# Altium PCB Inverter - Copy (2).PcbDoc (part 2 of 2)
Units mm, origin at the board's own origin, x right, y up, seen from the top; angles counter-clockwise.
Board outline 150 x 100 mm, 2 copper layers (Top Layer, Bottom Layer), stack 1.74 mm thick; 290 components, 203 nets, 1847 pads, 721 vias.
Unrouted connection lines stored in the file: 462.
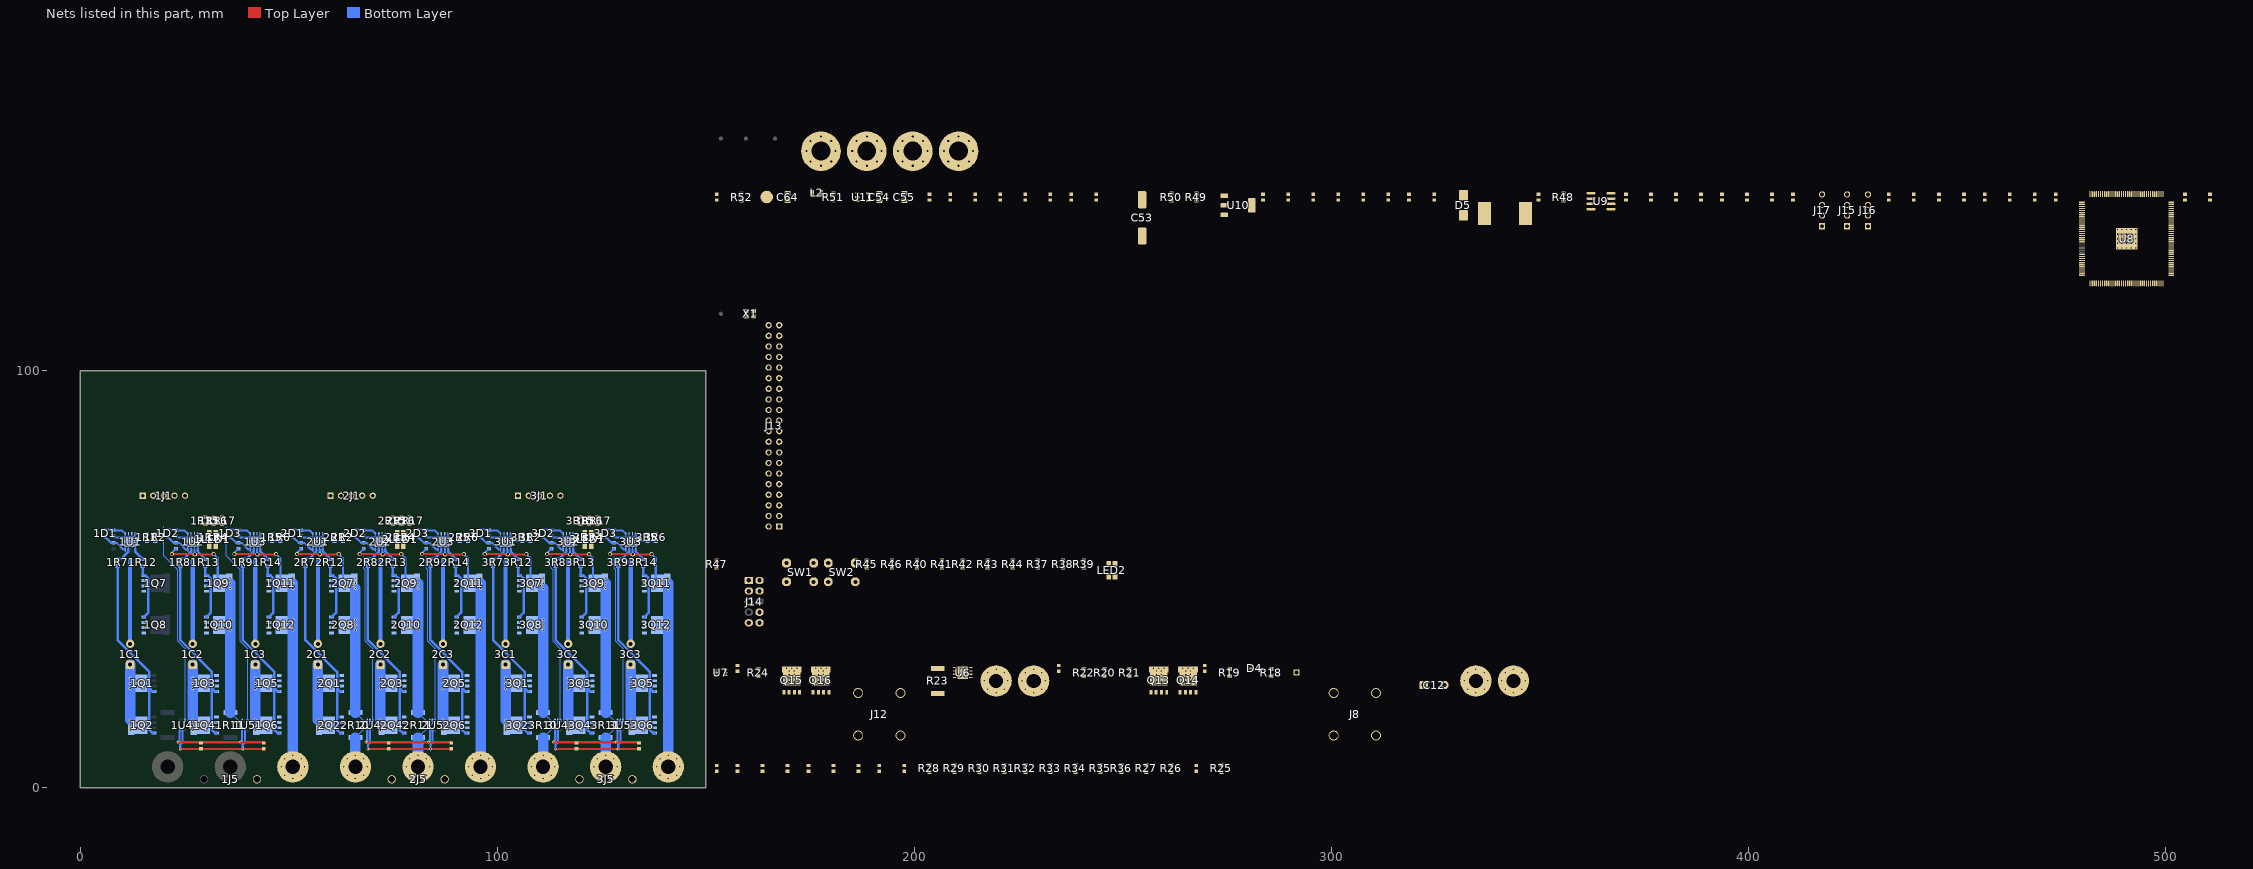
[diagram p2: the nets of this part, all layers, seen from the top]

## Via types
v1: diameter 0.7, hole 0.3, Top Layer to Bottom Layer, 525 vias
v2: diameter 0.7, hole 0.35, Top Layer to Bottom Layer, 128 vias
v3: diameter 1, hole 0.6, Top Layer to Bottom Layer, 36 vias
v4: diameter 1.27, hole 0.5, Top Layer to Bottom Layer, 32 vias

## Nets (pads, with @x,y where several pads share a name; then routed paths per layer and width w, separated by ;. In a path a pad name is that pad's centre, name@x,y a point inside that pad or via, vN(x,y) a via of type N, cw(c..) or ccw(c..) an arc to the next point about the centre after c; other vN are vias at no path point) (continued)
1PH_B_Q: 1C5.1 1Q3.S 1Q4.S 1Q9.D 1Q10.D 1R11.2 1U2.6 1U5.4 | length 54.4
  Top Layer w0.5: v3(22,56) v3@27.4,56 ; v3(27.5,55.9) v3@31.9,55.9
  Bottom Layer w0.254: 1R11.2@36,18 37.875,16.125 1U5.4@38.85,16.125
  Bottom Layer w0.5: v3@22,56.3 1C5.1@23,57.3 ; v3@27.45,55.95 1U2.6@27.45,57.055 ; v3(32,56) 33,55 1Q9.D@33,49
  Bottom Layer w2.54: 1R11.2@36,18 v1(36,39) v1(36,40.25) v1(36,47.75) v1(36,49)
  other v1: 36,37.75 32.875,38.425 33.7,38.425 34.55,38.425 35.375,38.425 32.9,39.575 33.725,39.575 34.575,39.575 35.4,39.575 32.875,48.425 33.7,48.425 34.55,48.425 35.375,48.425 32.9,49.575 33.725,49.575 34.575,49.575 35.4,49.575 36,50.25
1PH_C: 1C6.1 1J4.1 1J5.3 1Q5.S 1Q6.S 1Q11.D 1Q12.D 1U3.6 | length 63.7
  Top Layer w0.5: v3(37,56) v3@42.4,56 ; v3(42.5,55.9) v3@46.9,55.9
  Bottom Layer w0.5: v3@37,56.3 1C6.1@38,57.3 ; v3@42.45,55.95 1U3.6@42.45,57.055 ; v3(47,56) 48,55 1Q11.D@48,49
  Bottom Layer w2.54: 1J4.1@51,5 v1(51,37.75) v1(51,39) v1(51,40.25) v1(51,47.75) v1(51,49)
  other v1: 47.875,38.425 48.7,38.425 49.55,38.425 50.375,38.425 47.9,39.575 48.725,39.575 49.575,39.575 50.4,39.575 47.875,48.425 48.7,48.425 49.55,48.425 50.375,48.425 47.9,49.575 48.725,49.575 49.575,49.575 50.4,49.575 51,50.25
  other v2: 51,2.2 49.02,3.02 52.98,3.02 48.2,5 53.8,5 49.02,6.98 52.98,6.98 51,7.8
2PH_A: 2J2.1 2J5.1 2R10.1 2U4.5 | length 12.6
  Bottom Layer w0.254: 2R10.1@66,12 69.5,15.5 2U4.5@69.5,16.125
  Bottom Layer w2.54: 2J2.1@66,5 v2(66,7.8) 2R10.1@66,12
  other v2: 66,2.2 64.02,3.02 67.98,3.02 63.2,5 68.8,5 64.02,6.98 67.98,6.98
2PH_A_Q: 2C4.1 2Q1.S 2Q2.S 2Q7.D 2Q8.D 2R10.2 2U1.6 2U4.4 | length 53.7
  Top Layer w0.5: v3(52,56) v3@57.4,56 ; v3(57.5,55.9) 61.9,55.9 v3(62,56)
  Bottom Layer w0.254: 2R10.2@66,18 67.875,16.125 2U4.4@68.85,16.125
  Bottom Layer w0.5: v3(52,56) 52,56.3 2C4.1@53,57.3 ; 2U1.6@57.4,57.105 57.45,57.055 57.45,55.95 v3(57.5,55.9) ; v3(62,56) 63,55 2Q7.D@63,49
  Bottom Layer w2.54: 2R10.2@66,18 v1(66,37.75) v1(66,39) v1(66,40.25) v1(66,47.75)
  other v1: 62.875,38.425 63.7,38.425 64.55,38.425 65.375,38.425 62.9,39.575 63.725,39.575 64.575,39.575 65.4,39.575 62.875,48.425 63.7,48.425 64.55,48.425 65.375,48.425 66,49 62.9,49.575 63.725,49.575 64.575,49.575 65.4,49.575 66,50.25
2PH_B: 2J3.1 2J5.2 2R11.1 2U5.5 | length 12.6
  Bottom Layer w0.254: 2R11.1@81,12 84.5,15.5 2U5.5@84.5,16.125
  Bottom Layer w2.54: 2J3.1@81,5 v2(81,7.8) 2R11.1@81,12
  other v2: 81,2.2 79.02,3.02 82.98,3.02 78.2,5 83.8,5 79.02,6.98 82.98,6.98
2PH_B_Q: 2C5.1 2Q3.S 2Q4.S 2Q9.D 2Q10.D 2R11.2 2U2.6 2U5.4 | length 54.4
  Top Layer w0.5: v3(67,56) v3@72.4,56 ; v3(72.5,55.9) v3@76.9,55.9
  Bottom Layer w0.254: 2R11.2@81,18 82.875,16.125 2U5.4@83.85,16.125
  Bottom Layer w0.5: v3@67,56.3 2C5.1@68,57.3 ; v3@72.45,55.95 2U2.6@72.45,57.055 ; v3(77,56) 78,55 2Q9.D@78,49
  Bottom Layer w2.54: 2R11.2@81,18 v1(81,39) v1(81,40.25) v1(81,47.75) v1(81,49)
  other v1: 81,37.75 77.875,38.425 78.7,38.425 79.55,38.425 80.375,38.425 77.9,39.575 78.725,39.575 79.575,39.575 80.4,39.575 77.875,48.425 78.7,48.425 79.55,48.425 80.375,48.425 77.9,49.575 78.725,49.575 79.575,49.575 80.4,49.575 81,50.25
2PH_C: 2C6.1 2J4.1 2J5.3 2Q5.S 2Q6.S 2Q11.D 2Q12.D 2U3.6 | length 63.7
  Top Layer w0.5: v3(82,56) v3@87.4,56 ; v3(87.5,55.9) v3@91.9,55.9
  Bottom Layer w0.5: v3@82,56.3 2C6.1@83,57.3 ; v3@87.45,55.95 2U3.6@87.45,57.055 ; v3(92,56) 93,55 2Q11.D@93,49
  Bottom Layer w2.54: 2J4.1@96,5 v1(96,37.75) v1(96,39) v1(96,40.25) v1(96,47.75) v1(96,49)
  other v1: 92.875,38.425 93.7,38.425 94.55,38.425 95.375,38.425 92.9,39.575 93.725,39.575 94.575,39.575 95.4,39.575 92.875,48.425 93.7,48.425 94.55,48.425 95.375,48.425 92.9,49.575 93.725,49.575 94.575,49.575 95.4,49.575 96,50.25
  other v2: 96,2.2 94.02,3.02 97.98,3.02 93.2,5 98.8,5 94.02,6.98 97.98,6.98 96,7.8
3PH_A: 3J2.1 3J5.1 3R10.1 3U4.5 | length 12.6
  Bottom Layer w0.254: 3R10.1@111,12 114.5,15.5 3U4.5@114.5,16.125
  Bottom Layer w2.54: 3J2.1@111,5 v2(111,7.8) 3R10.1@111,12
  other v2: 111,2.2 109.02,3.02 112.98,3.02 108.2,5 113.8,5 109.02,6.98 112.98,6.98
3PH_A_Q: 3C4.1 3Q1.S 3Q2.S 3Q7.D 3Q8.D 3R10.2 3U1.6 3U4.4 | length 53.7
  Top Layer w0.5: v3(97,56) v3@102.4,56 ; v3(102.5,55.9) 106.9,55.9 v3(107,56)
  Bottom Layer w0.254: 3R10.2@111,18 112.875,16.125 3U4.4@113.85,16.125
  Bottom Layer w0.5: v3(97,56) 97,56.3 3C4.1@98,57.3 ; 3U1.6@102.4,57.105 102.45,57.055 102.45,55.95 v3(102.5,55.9) ; v3(107,56) 108,55 3Q7.D@108,49
  Bottom Layer w2.54: 3R10.2@111,18 v1(111,37.75) v1(111,39) v1(111,40.25) v1(111,47.75)
  other v1: 107.875,38.425 108.7,38.425 109.55,38.425 110.375,38.425 107.9,39.575 108.725,39.575 109.575,39.575 110.4,39.575 107.875,48.425 108.7,48.425 109.55,48.425 110.375,48.425 111,49 107.9,49.575 108.725,49.575 109.575,49.575 110.4,49.575 111,50.25
3PH_B: 3J3.1 3J5.2 3R11.1 3U5.5 | length 12.6
  Bottom Layer w0.254: 3R11.1@126,12 129.5,15.5 3U5.5@129.5,16.125
  Bottom Layer w2.54: 3J3.1@126,5 v2(126,7.8) 3R11.1@126,12
  other v2: 126,2.2 124.02,3.02 127.98,3.02 123.2,5 128.8,5 124.02,6.98 127.98,6.98
3PH_B_Q: 3C5.1 3Q3.S 3Q4.S 3Q9.D 3Q10.D 3R11.2 3U2.6 3U5.4 | length 54.4
  Top Layer w0.5: v3(112,56) v3@117.4,56 ; v3(117.5,55.9) v3@121.9,55.9
  Bottom Layer w0.254: 3R11.2@126,18 127.875,16.125 3U5.4@128.85,16.125
  Bottom Layer w0.5: v3@112,56.3 3C5.1@113,57.3 ; v3@117.45,55.95 3U2.6@117.45,57.055 ; v3(122,56) 123,55 3Q9.D@123,49
  Bottom Layer w2.54: 3R11.2@126,18 v1(126,39) v1(126,40.25) v1(126,47.75) v1(126,49)
  other v1: 126,37.75 122.875,38.425 123.7,38.425 124.55,38.425 125.375,38.425 122.9,39.575 123.725,39.575 124.575,39.575 125.4,39.575 122.875,48.425 123.7,48.425 124.55,48.425 125.375,48.425 122.9,49.575 123.725,49.575 124.575,49.575 125.4,49.575 126,50.25
3PH_C: 3C6.1 3J4.1 3J5.3 3Q5.S 3Q6.S 3Q11.D 3Q12.D 3U3.6 | length 63.7
  Top Layer w0.5: v3(127,56) v3@132.4,56 ; v3(132.5,55.9) v3@136.9,55.9
  Bottom Layer w0.5: v3@127,56.3 3C6.1@128,57.3 ; v3@132.45,55.95 3U3.6@132.45,57.055 ; v3(137,56) 138,55 3Q11.D@138,49
  Bottom Layer w2.54: 3J4.1@141,5 v1(141,37.75) v1(141,39) v1(141,40.25) v1(141,47.75) v1(141,49)
  other v1: 137.875,38.425 138.7,38.425 139.55,38.425 140.375,38.425 137.9,39.575 138.725,39.575 139.575,39.575 140.4,39.575 137.875,48.425 138.7,48.425 139.55,48.425 140.375,48.425 137.9,49.575 138.725,49.575 139.575,49.575 140.4,49.575 141,50.25
  other v2: 141,2.2 139.02,3.02 142.98,3.02 138.2,5 143.8,5 139.02,6.98 142.98,6.98 141,7.8
5V: 1J1.1 2J1.1 3J1.1 C53.1 J15.1 J15.2 J15.3 J15.4 L1.1 R49.1 U10.3
12V: 1C7.2 1C8.2 1C9.2 1D1.A 1D2.A 1D3.A 1U1.1 1U2.1 1U3.1 2C7.2 2C8.2 2C9.2 2D1.A 2D2.A 2D3.A 2U1.1 2U2.1 2U3.1 3C7.2 3C8.2 3C9.2 3D1.A 3D2.A 3D3.A 3U1.1 3U2.1 3U3.1 C14.2 C65.2 D4.A U6.1 U11.5 | length 46.9
  Bottom Layer w0.5: 1D1.A@6,61.9 7.8,61.9 1C7.2@8,61.7 9.995,61.7 1U1.1@10.8,60.895 ; 1D2.A@21,61.9 22.8,61.9 1C8.2@23,61.7 24.995,61.7 1U2.1@25.8,60.895 ; 1D3.A@36,61.9 37.8,61.9 1C9.2@38,61.7 39.995,61.7 1U3.1@40.8,60.895 ; 2D1.A@51,61.9 52.8,61.9 2C7.2@53,61.7 54.995,61.7 2U1.1@55.8,60.895 ; 2D2.A@66,61.9 67.8,61.9 2C8.2@68,61.7 69.995,61.7 2U2.1@70.8,60.895 ; 2D3.A@81,61.9 82.8,61.9 2C9.2@83,61.7 84.995,61.7 2U3.1@85.8,60.895 ; 3D1.A@96,61.9 97.8,61.9 3C7.2@98,61.7 99.995,61.7 3U1.1@100.8,60.895 ; 3D2.A@111,61.9 112.8,61.9 3C8.2@113,61.7 114.995,61.7 3U2.1@115.8,60.895 ; 3D3.A@126,61.9 127.8,61.9 3C9.2@128,61.7 129.995,61.7 3U3.1@130.8,60.895
AGND: 1C10.1 1C11.1 1U4.2 1U5.2 2C10.1 2C11.1 2U4.2 2U5.2 3C10.1 3C11.1 3U4.2 3U5.2 C15.1 C16.1 C17.1 C18.1 C19.1 C20.1 C21.1 C22.1 C23.1 C24.1 C25.1 C26.1 C27.1 C45.1 C46.1 C47.1 C48.1 C49.1 C50.1 C51.1 C52.1 C64.1 R19.1 R27.1 R52.1 SP1.2 U7.2 U8.4 | length 88.7
  Top Layer w0.5: v2@24,9.248 29,9.248 1C11.1@44,9.248 ; v2@69,9.248 74,9.248 2C11.1@89,9.248 ; v2@114,9.248 119,9.248 3C11.1@134,9.248
  Bottom Layer w0.5: v2(24,9.3) 24,10.336 24.5,10.836 1U4.2@24.5,13.875 ; v2(39,9.3) 39,10.336 39.5,10.836 1U5.2@39.5,13.875 ; v2(69,9.3) 69,10.336 69.5,10.836 2U4.2@69.5,13.875 ; v2(84,9.3) 84,10.336 84.5,10.836 2U5.2@84.5,13.875 ; v2(114,9.3) 114,10.336 114.5,10.836 3U4.2@114.5,13.875 ; v2(129,9.3) 129,10.336 129.5,10.836 3U5.2@129.5,13.875
AUX_+: J10.1 J12.1 R23.1 U7.5
  other v2: 219.6,22.8 217.62,23.62 221.58,23.62 216.8,25.6 222.4,25.6 217.62,27.58 221.58,27.58 219.6,28.4
AVCC: 1C10.2 1C11.2 1U4.3 1U5.3 2C10.2 2C11.2 2U4.3 2U5.3 3C10.2 3C11.2 3U4.3 3U5.3 C15.2 C26.2 C27.2 C45.2 C46.2 C47.2 C48.2 C49.2 C50.2 C51.2 C52.2 C64.2 L2.1 R25.2 U7.3 U8.2 U8.9 U8.34 U8.35 U8.71 U8.107 U8.143 | length 80.2
  Top Layer w0.5: v2(23.5,10.9) 1C11.2@44,10.9 ; v2(68.5,10.9) 2C11.2@89,10.9 ; v2(113.5,10.9) 3C11.2@134,10.9
  Bottom Layer w0.5: v2(23.5,10.9) 23.848,11.248 1U4.3@23.848,13.875 ; v2(38.5,10.9) 38.848,11.248 1U5.3@38.848,13.873 ; v2(68.5,10.9) 68.848,11.248 2U4.3@68.848,13.875 ; v2(83.5,10.9) 83.848,11.248 2U5.3@83.848,13.873 ; v2(113.5,10.9) 113.848,11.248 3U4.3@113.848,13.875 ; v2(128.5,10.9) 128.848,11.248 3U5.3@128.848,13.873
CLK_50: U8.27 X1.3
CONF_DONE: R45.1 U8.138
CRC_ERROR: R38.2 U8.134
DCBUS: 1C1.1 1C2.1 1C3.1 1Q1.D 1Q2.D 1Q3.D 1Q4.D 1Q5.D 1Q6.D 2C1.1 2C2.1 2C3.1 2Q1.D 2Q2.D 2Q3.D 2Q4.D 2Q5.D 2Q6.D 3C1.1 3C2.1 3C3.1 3Q1.D 3Q2.D 3Q3.D 3Q4.D 3Q5.D 3Q6.D C12.1 J6.1 J8.2 Q13.D Q14.D R26.2 R48.2 U9.6 U11.4 | length 119.2
  Bottom Layer w2.54: v1(12,16.25) v1(12,23.75) v1(12,25) v1(12,26.25) 1C1.1@12,29.5 ; v1(27,16.25) v1(27,23.75) v1(27,25) v1(27,26.25) 1C2.1@27,29.5 ; v1(42,16.25) v1(42,23.75) v1(42,25) v1(42,26.25) 1C3.1@42,29.5 ; v1(57,16.25) v1(57,23.75) v1(57,25) v1(57,26.25) 2C1.1@57,29.5 ; v1(72,16.25) v1(72,23.75) v1(72,25) v1(72,26.25) 2C2.1@72,29.5 ; v1(87,16.25) v1(87,23.75) v1(87,25) v1(87,26.25) 2C3.1@87,29.5 ; v1(102,16.25) v1(102,23.75) v1(102,25) v1(102,26.25) 3C1.1@102,29.5 ; v1(117,16.25) v1(117,23.75) v1(117,25) v1(117,26.25) 3C2.1@117,29.5 ; v1(132,16.25) v1(132,23.75) v1(132,25) v1(132,26.25) 3C3.1@132,29.5
  other v1: 12,13.75 27,13.75 42,13.75 57,13.75 72,13.75 87,13.75 102,13.75 117,13.75 132,13.75 12.6,14.425 13.425,14.425 14.275,14.425 15.1,14.425 27.6,14.425 28.425,14.425 29.275,14.425 30.1,14.425 42.6,14.425 43.425,14.425 44.275,14.425 45.1,14.425 57.6,14.425 58.425,14.425 59.275,14.425 60.1,14.425 72.6,14.425 73.425,14.425 74.275,14.425 75.1,14.425 87.6,14.425 88.425,14.425 89.275,14.425 90.1,14.425 102.6,14.425 103.425,14.425 104.275,14.425 105.1,14.425 117.6,14.425 118.425,14.425 119.275,14.425 120.1,14.425 132.6,14.425 133.425,14.425 134.275,14.425 135.1,14.425 12,15 27,15 42,15 57,15 72,15 87,15 102,15 117,15 132,15 12.625,15.575 13.45,15.575 14.3,15.575 15.125,15.575 27.625,15.575 28.45,15.575 29.3,15.575 30.125,15.575 42.625,15.575 43.45,15.575 44.3,15.575 45.125,15.575 57.625,15.575 58.45,15.575 59.3,15.575 60.125,15.575 72.625,15.575 73.45,15.575 74.3,15.575 75.125,15.575 87.625,15.575 88.45,15.575 89.3,15.575 90.125,15.575 102.625,15.575 103.45,15.575 104.3,15.575 105.125,15.575 117.625,15.575 118.45,15.575 119.3,15.575 120.125,15.575 132.625,15.575 133.45,15.575 134.3,15.575 135.125,15.575 12.6,24.425 13.425,24.425 14.275,24.425 15.1,24.425 27.6,24.425 28.425,24.425 29.275,24.425 30.1,24.425 42.6,24.425 43.425,24.425 44.275,24.425 45.1,24.425 57.6,24.425 58.425,24.425 59.275,24.425 60.1,24.425 72.6,24.425 73.425,24.425 74.275,24.425 75.1,24.425 87.6,24.425 88.425,24.425 89.275,24.425 90.1,24.425 102.6,24.425 103.425,24.425 104.275,24.425 105.1,24.425 117.6,24.425 118.425,24.425 119.275,24.425 120.1,24.425 132.6,24.425 133.425,24.425 134.275,24.425 135.1,24.425 258.025,25.475 265.025,25.475 259.175,25.5 266.175,25.5 12.625,25.575 13.45,25.575 14.3,25.575 15.125,25.575 27.625,25.575 28.45,25.575 29.3,25.575 30.125,25.575 42.625,25.575 43.45,25.575 44.3,25.575 45.125,25.575 57.625,25.575 58.45,25.575 59.3,25.575 60.125,25.575 72.625,25.575 73.45,25.575 74.3,25.575 75.125,25.575 87.625,25.575 88.45,25.575 89.3,25.575 90.125,25.575 102.625,25.575 103.45,25.575 104.3,25.575 105.125,25.575 117.625,25.575 118.45,25.575 119.3,25.575 120.125,25.575 132.625,25.575 133.45,25.575 134.3,25.575 135.125,25.575 258.025,26.3 265.025,26.3 259.175,26.325 266.175,26.325 258.025,27.15 265.025,27.15 259.175,27.175 266.175,27.175 258.025,27.975 265.025,27.975 259.175,28 266.175,28 257.35,28.6 258.6,28.6 259.85,28.6 264.35,28.6 265.6,28.6 266.85,28.6
  other v2: 334.6,22.8 332.62,23.62 336.58,23.62 331.8,25.6 337.4,25.6 332.62,27.58 336.58,27.58 334.6,28.4
ENC_A1: 1J1.2 U8.124
ENC_A2: 2J1.2 U8.131
ENC_A3: 3J1.2 U8.140
ENC_B1: 1J1.3 U8.127
ENC_B2: 2J1.3 U8.132
ENC_B3: 3J1.3 U8.141
ENC_Z1: 1J1.4 U8.130
ENC_Z2: 2J1.4 U8.135
ENC_Z3: 3J1.4 U8.120
GND: 1C1.2 1C2.2 1C3.2 1C7.1 1C8.1 1C9.1 1J1.5 1Q7.S 1Q8.S 1Q9.S 1Q10.S 1Q11.S 1Q12.S 1R1.1 1R2.1 1R3.1 1R4.1 1R5.1 1R6.1 1U1.4 1U1.9 1U2.4 1U2.9 1U3.4 1U3.9 2C1.2 2C2.2 2C3.2 2C7.1 2C8.1 2C9.1 2J1.5 2Q7.S 2Q8.S 2Q9.S 2Q10.S 2Q11.S 2Q12.S 2R1.1 2R2.1 2R3.1 2R4.1 2R5.1 2R6.1 2U1.4 2U1.9 2U2.4 2U2.9 2U3.4 2U3.9 3C1.2 3C2.2 3C3.2 3C7.1 3C8.1 3C9.1 3J1.5 3Q7.S 3Q8.S 3Q9.S 3Q10.S 3Q11.S 3Q12.S 3R1.1 3R2.1 3R3.1 3R4.1 3R5.1 3R6.1 3U1.4 3U1.9 3U2.4 3U2.9 3U3.4 3U3.9 C12.2 C14.1 C28.1 C29.1 C30.1 C31.1 C32.1 C33.1 C34.1 C35.1 C36.1 C37.1 C38.1 C39.1 C40.1 C41.1 C42.1 C43.1 C44.1 C53.2 C54.1 C55.1 C56.1 C57.1 C58.1 C59.1 C60.1 C61.1 C62.1 C63.1 C65.1 D5.A J7.1 J8.1 J11.1 J12.2 J14.2 J14.10 J17.1 J17.2 J17.3 J17.4 MH1.1 MH2.1 MH3.1 MH4.1 Q15.S Q16.S R20.1 R21.1 R47.1 R50.1 SP1.1 SW1.1 SW2.1 U6.4 U6.9 U8.42 U8.53 U8.63 U8.68 U8.83 U8.95 U8.104 U8.116 U8.125 U8.133 U8.137 U8.142 U8.145 U9.4 U10.1 U11.2 X1.2 | length 274.9
  Bottom Layer w0.5: 1C7.1@8,60.3 8.3,60 10.5,60 v1(11,59.5) ; 1U1.9@12,59 12.15,59.15 1R1.1@16,59.15 1R2.1@18,59.15 ; v1(13,59.5) 13.2,59.7 1U1.4@13.2,60.895 ; 1C8.1@23,60.3 23.3,60 25.5,60 v1(26,59.5) ; 1U2.9@27.15,59.15 1R3.1@31,59.15 1R4.1@33,59.15 ; 1U2.9@28.2,59.7 1U2.4@28.2,60.895 ; 1C9.1@38,60.3 38.3,60 40.5,60 v1(41,59.5) ; 1U3.9@42.15,59.15 1R5.1@46,59.15 1R6.1@48,59.15 ; 1U3.9@43.2,59.7 1U3.4@43.2,60.895 ; 2C7.1@53,60.3 53.3,60 55.5,60 v1(56,59.5) ; 2U1.9@57,59 57.15,59.15 2R1.1@61,59.15 2R2.1@63,59.15 ; v1(58,59.5) 58.2,59.7 2U1.4@58.2,60.895 ; 2C8.1@68,60.3 68.3,60 70.5,60 v1(71,59.5) ; 2U2.9@72.15,59.15 2R3.1@76,59.15 2R4.1@78,59.15 ; 2U2.9@73.2,59.7 2U2.4@73.2,60.895 ; 2C9.1@83,60.3 83.3,60 85.5,60 v1(86,59.5) ; 2U3.9@87.15,59.15 2R5.1@91,59.15 2R6.1@93,59.15 ; 2U3.9@88.2,59.7 2U3.4@88.2,60.895 ; 3C7.1@98,60.3 98.3,60 100.5,60 v1(101,59.5) ; 3U1.9@102,59 102.15,59.15 3R1.1@106,59.15 3R2.1@108,59.15 ; v1(103,59.5) 103.2,59.7 3U1.4@103.2,60.895 ; 3C8.1@113,60.3 113.3,60 115.5,60 v1(116,59.5) ; 3U2.9@117.15,59.15 3R3.1@121,59.15 3R4.1@123,59.15 ; 3U2.9@118.2,59.7 3U2.4@118.2,60.895 ; 3C9.1@128,60.3 128.3,60 130.5,60 v1(131,59.5) ; 3U3.9@132.15,59.15 3R5.1@136,59.15 3R6.1@138,59.15 ; 3U3.9@133.2,59.7 3U3.4@133.2,60.895
  Bottom Layer w1: 1C1.2@12,34.5 12,54.5 ; 1C2.2@27,34.5 27,54.5 ; 1C3.2@42,34.5 42,54.5 ; 2C1.2@57,34.5 57,54.5 ; 2C2.2@72,34.5 72,54.5 ; 2C3.2@87,34.5 87,54.5 ; 3C1.2@102,34.5 102,54.5 ; 3C2.2@117,34.5 117,54.5 ; 3C3.2@132,34.5 132,54.5
  other v1: 211.1,26.6 212.1,26.6 211.1,27.6 212.1,27.6 211.1,28.6 212.1,28.6 11,58.5 12,58.5 13,58.5 26,58.5 27,58.5 28,58.5 41,58.5 42,58.5 43,58.5 56,58.5 57,58.5 58,58.5 71,58.5 72,58.5 73,58.5 86,58.5 87,58.5 88,58.5 101,58.5 102,58.5 103,58.5 116,58.5 117,58.5 118,58.5 131,58.5 132,58.5 133,58.5 12,59.5 27,59.5 28,59.5 42,59.5 43,59.5 57,59.5 72,59.5 73,59.5 87,59.5 88,59.5 102,59.5 117,59.5 118,59.5 132,59.5 133,59.5 488.4,129.4 489.5,129.4 490.6,129.4 491.7,129.4 492.8,129.4 488.4,130.5 489.5,130.5 490.6,130.5 491.7,130.5 492.8,130.5 488.4,131.6 489.5,131.6 490.6,131.6 491.7,131.6 492.8,131.6 488.4,132.7 489.5,132.7 490.6,132.7 491.7,132.7 492.8,132.7 488.4,133.8 489.5,133.8 490.6,133.8 491.7,133.8 492.8,133.8
  other v2: 228.6,22.8 343.6,22.8 226.62,23.62 230.58,23.62 341.62,23.62 345.58,23.62 225.8,25.6 231.4,25.6 340.8,25.6 346.4,25.6 226.62,27.58 230.58,27.58 341.62,27.58 345.58,27.58 228.6,28.4 343.6,28.4
  other v4: 177.6,149.1 188.6,149.1 199.6,149.1 210.6,149.1 175.125,150.125 180.075,150.125 186.125,150.125 191.075,150.125 197.125,150.125 202.075,150.125 208.125,150.125 213.075,150.125 174.1,152.6 181.1,152.6 185.1,152.6 192.1,152.6 196.1,152.6 203.1,152.6 207.1,152.6 214.1,152.6 175.125,155.075 180.075,155.075 186.125,155.075 191.075,155.075 197.125,155.075 202.075,155.075 208.125,155.075 213.075,155.075 177.6,156.1 188.6,156.1 199.6,156.1 210.6,156.1
GPIO1: J13.1 U8.75
GPIO2: J13.2 U8.74
GPIO3: J13.3 U8.77
GPIO4: J13.4 U8.76
GPIO5: J13.5 U8.79
GPIO6: J13.6 U8.78
GPIO7: J13.7 U8.81
GPIO8: J13.8 U8.85
GPIO9: J13.9 U8.84
GPIO10: J13.10 U8.87
GPIO11: J13.11 U8.86
GPIO12: J13.12 U8.110
GPIO13: J13.13 U8.111
GPIO14: J13.14 U8.113
GPIO15: J13.15 U8.114
GPIO16: J13.16 U8.118
GPIO17: J13.17 U8.119
GPIO18: J13.18 U8.26
GPIO19: J13.19 U8.28
GPIO20: J13.20 U8.29
GPIO21: J13.21 U8.88
GPIO22: J13.22 U8.89
GPIO23: J13.23 U8.90
GPIO24: J13.24 U8.91
GPIO25: J13.25 U8.96
GPIO26: J13.26 U8.98
GPIO27: J13.27 U8.17
GPIO28: J13.28 U8.30
GPIO29: J13.29 U8.48
GPIO30: J13.30 U8.61
GPIO31: J13.31 U8.80
GPIO32: J13.32 U8.97
GPIO33: J13.33 U8.112
GPIO34: J13.34 U8.123
GPIO35: J13.35 U8.32
GPIO36: J13.36 U8.33
GPIO37: J13.37 U8.105
GPIO38: J13.38 U8.106
IA1: 1U4.6 R29.1 | length 48.5
  Bottom Layer w0.254: 20,62.5 20,55.573 23.373,52.2 23.373,35.119 25.15,33.342 1U4.6@25.15,16.125
IA2: 2U4.6 R31.1 | length 40.3
  Bottom Layer w0.254: 68,55.5 68,52.573 68.373,52.2 68.373,35.119 70.15,33.342 2U4.6@70.15,16.125
IA3: 3U4.6 R33.1 | length 40.3
  Bottom Layer w0.254: 113,55.5 113,52.573 113.373,52.2 113.373,35.119 115.15,33.342 3U4.6@115.15,16.125
IB1: 1U5.6 R30.1 | length 48.5
  Bottom Layer w0.254: 35,62.5 35,55.573 38.373,52.2 38.373,35.119 40.15,33.342 1U5.6@40.15,16.125
IB2: 2U5.6 R32.1 | length 40.3
  Bottom Layer w0.254: 83,55.5 83,52.573 83.373,52.2 83.373,35.119 85.15,33.342 2U5.6@85.15,16.125
IB3: 3U5.6 R34.1 | length 40.3
  Bottom Layer w0.254: 128,55.5 128,52.573 128.373,52.2 128.373,35.119 130.15,33.342 3U5.6@130.15,16.125
JTAGEN: J14.8 R42.1 U8.15
LEDB1: 1R17.2 U8.50
LEDB2: 2R17.2 U8.65
LEDB3: 3R17.2 U8.70
LEDG1: 1R16.2 U8.47
LEDG2: 2R16.2 U8.64
LEDG3: 3R16.2 U8.69
LEDR1: 1R15.2 U8.46
LEDR2: 2R15.2 U8.62
LEDR3: 3R15.2 U8.66
NCONFIG: R44.1 SW2.2 U8.129
Net1C4_2: 1C4.2 1D1.K 1U1.8 | length 6
  Bottom Layer w0.5: 1D1.K@6,60.1 7.4,58.7 1C4.2@8,58.7 8.75,58.7 10.345,57.105 1U1.8@10.8,57.105
Net1C5_2: 1C5.2 1D2.K 1U2.8 | length 6
  Bottom Layer w0.5: 1D2.K@21,60.1 22.4,58.7 1C5.2@23,58.7 23.75,58.7 25.345,57.105 1U2.8@25.8,57.105
Net1C6_2: 1C6.2 1D3.K 1U3.8 | length 6
  Bottom Layer w0.5: 1D3.K@36,60.1 37.4,58.7 1C6.2@38,58.7 38.75,58.7 40.345,57.105 1U3.8@40.8,57.105
Net1LED1_1: 1LED1.1 1R15.1
Net1LED1_2: 1LED1.2 1R16.1
Net1LED1_3: 1LED1.3 1R17.1
Net1Q1_G: 1Q1.G 1Q2.G 1R7.1 | length 45.3
  Bottom Layer w0.6: 1R7.1@9,53.15 9,35.379 16.6,27.779 16.6,23.858 ; 1Q2.G@17.725,13.095 17.363,13.095 16.6,13.858 16.6,23.858 ; 1Q1.G@17.725,23.095 17.363,23.095 16.6,23.858
Net1Q3_G: 1Q3.G 1Q4.G 1R8.1 | length 45.3
  Bottom Layer w0.6: 1R8.1@24,53.15 24,35.379 31.6,27.779 31.6,23.858 ; 1Q4.G@32.725,13.095 32.363,13.095 31.6,13.858 31.6,23.858 ; 1Q3.G@32.725,23.095 32.363,23.095 31.6,23.858
Net1Q5_G: 1Q5.G 1Q6.G 1R9.1 | length 45.3
  Bottom Layer w0.6: 1R9.1@39,53.15 39,35.379 46.6,27.779 46.6,23.858 ; 1Q6.G@47.725,13.095 47.363,13.095 46.6,13.858 46.6,23.858 ; 1Q5.G@47.725,23.095 47.363,23.095 46.6,23.858
Net1Q7_G: 1Q7.G 1Q8.G 1R12.1 | length 13.5
  Bottom Layer w0.6: 1R12.1@15,53.15 15,51.18 1Q7.G@15.275,50.905 15.637,50.905 16.35,50.192 16.35,41.98 1Q8.G@15.275,40.905
Net1Q9_G: 1Q9.G 1Q10.G 1R13.1 | length 13.5
  Bottom Layer w0.6: 1R13.1@30,53.15 30,51.18 1Q9.G@30.275,50.905 30.637,50.905 31.35,50.192 31.35,41.98 1Q10.G@30.275,40.905
Net1Q11_G: 1Q11.G 1Q12.G 1R14.1 | length 13.5
  Bottom Layer w0.6: 1R14.1@45,53.15 45,51.18 1Q11.G@45.275,50.905 45.637,50.905 46.35,50.192 46.35,41.98 1Q12.G@45.275,40.905
Net1R7_2: 1R7.2 1U1.7 | length 3.8
  Bottom Layer w0.6: 1R7.2@9,54.85 9.852,54.85 11.6,56.598 1U1.7@11.6,57.105
Net1R8_2: 1R8.2 1U2.7 | length 3.8
  Bottom Layer w0.6: 1R8.2@24,54.85 24.852,54.85 26.6,56.598 1U2.7@26.6,57.105
Net1R9_2: 1R9.2 1U3.7 | length 3.8
  Bottom Layer w0.6: 1R9.2@39,54.85 39.852,54.85 41.6,56.598 1U3.7@41.6,57.105
Net1R12_2: 1R12.2 1U1.5 | length 3
  Bottom Layer w0.6: 1U1.5@13.2,57.105 13.2,56.65 1R12.2@15,54.85
Net1R13_2: 1R13.2 1U2.5 | length 3
  Bottom Layer w0.6: 1U2.5@28.2,57.105 28.2,56.65 1R13.2@30,54.85
Net1R14_2: 1R14.2 1U3.5 | length 3
  Bottom Layer w0.6: 1U3.5@43.2,57.105 43.2,56.65 1R14.2@45,54.85
Net2C4_2: 2C4.2 2D1.K 2U1.8 | length 6
  Bottom Layer w0.5: 2D1.K@51,60.1 52.4,58.7 2C4.2@53,58.7 53.75,58.7 55.345,57.105 2U1.8@55.8,57.105
Net2C5_2: 2C5.2 2D2.K 2U2.8 | length 6
  Bottom Layer w0.5: 2D2.K@66,60.1 67.4,58.7 2C5.2@68,58.7 68.75,58.7 70.345,57.105 2U2.8@70.8,57.105
Net2C6_2: 2C6.2 2D3.K 2U3.8 | length 6
  Bottom Layer w0.5: 2D3.K@81,60.1 82.4,58.7 2C6.2@83,58.7 83.75,58.7 85.345,57.105 2U3.8@85.8,57.105
Net2LED1_1: 2LED1.1 2R15.1
Net2LED1_2: 2LED1.2 2R16.1
Net2LED1_3: 2LED1.3 2R17.1
Net2Q1_G: 2Q1.G 2Q2.G 2R7.1 | length 45.3
  Bottom Layer w0.6: 2R7.1@54,53.15 54,35.379 61.6,27.779 61.6,23.858 ; 2Q2.G@62.725,13.095 62.363,13.095 61.6,13.858 61.6,23.858 ; 2Q1.G@62.725,23.095 62.363,23.095 61.6,23.858
Net2Q3_G: 2Q3.G 2Q4.G 2R8.1 | length 45.3
  Bottom Layer w0.6: 2R8.1@69,53.15 69,35.379 76.6,27.779 76.6,23.858 ; 2Q4.G@77.725,13.095 77.363,13.095 76.6,13.858 76.6,23.858 ; 2Q3.G@77.725,23.095 77.363,23.095 76.6,23.858
Net2Q5_G: 2Q5.G 2Q6.G 2R9.1 | length 45.3
  Bottom Layer w0.6: 2R9.1@84,53.15 84,35.379 91.6,27.779 91.6,23.858 ; 2Q6.G@92.725,13.095 92.363,13.095 91.6,13.858 91.6,23.858 ; 2Q5.G@92.725,23.095 92.363,23.095 91.6,23.858
Net2Q7_G: 2Q7.G 2Q8.G 2R12.1 | length 13.5
  Bottom Layer w0.6: 2R12.1@60,53.15 60,51.18 2Q7.G@60.275,50.905 60.637,50.905 61.35,50.192 61.35,41.98 2Q8.G@60.275,40.905
Net2Q9_G: 2Q9.G 2Q10.G 2R13.1 | length 13.5
  Bottom Layer w0.6: 2R13.1@75,53.15 75,51.18 2Q9.G@75.275,50.905 75.637,50.905 76.35,50.192 76.35,41.98 2Q10.G@75.275,40.905
Net2Q11_G: 2Q11.G 2Q12.G 2R14.1 | length 13.5
  Bottom Layer w0.6: 2R14.1@90,53.15 90,51.18 2Q11.G@90.275,50.905 90.637,50.905 91.35,50.192 91.35,41.98 2Q12.G@90.275,40.905
Net2R7_2: 2R7.2 2U1.7 | length 3.8
  Bottom Layer w0.6: 2R7.2@54,54.85 54.852,54.85 56.6,56.598 2U1.7@56.6,57.105
Net2R8_2: 2R8.2 2U2.7 | length 3.8
  Bottom Layer w0.6: 2R8.2@69,54.85 69.852,54.85 71.6,56.598 2U2.7@71.6,57.105
Net2R9_2: 2R9.2 2U3.7 | length 3.8
  Bottom Layer w0.6: 2R9.2@84,54.85 84.852,54.85 86.6,56.598 2U3.7@86.6,57.105
Net2R12_2: 2R12.2 2U1.5 | length 3
  Bottom Layer w0.6: 2U1.5@58.2,57.105 58.2,56.65 2R12.2@60,54.85
Net2R13_2: 2R13.2 2U2.5 | length 3
  Bottom Layer w0.6: 2U2.5@73.2,57.105 73.2,56.65 2R13.2@75,54.85
Net2R14_2: 2R14.2 2U3.5 | length 3
  Bottom Layer w0.6: 2U3.5@88.2,57.105 88.2,56.65 2R14.2@90,54.85
Net3C4_2: 3C4.2 3D1.K 3U1.8 | length 6
  Bottom Layer w0.5: 3D1.K@96,60.1 97.4,58.7 3C4.2@98,58.7 98.75,58.7 100.345,57.105 3U1.8@100.8,57.105
Net3C5_2: 3C5.2 3D2.K 3U2.8 | length 6
  Bottom Layer w0.5: 3D2.K@111,60.1 112.4,58.7 3C5.2@113,58.7 113.75,58.7 115.345,57.105 3U2.8@115.8,57.105
Net3C6_2: 3C6.2 3D3.K 3U3.8 | length 6
  Bottom Layer w0.5: 3D3.K@126,60.1 127.4,58.7 3C6.2@128,58.7 128.75,58.7 130.345,57.105 3U3.8@130.8,57.105
Net3LED1_1: 3LED1.1 3R15.1
Net3LED1_2: 3LED1.2 3R16.1
Net3LED1_3: 3LED1.3 3R17.1
Net3Q1_G: 3Q1.G 3Q2.G 3R7.1 | length 45.3
  Bottom Layer w0.6: 3R7.1@99,53.15 99,35.379 106.6,27.779 106.6,23.858 ; 3Q2.G@107.725,13.095 107.363,13.095 106.6,13.858 106.6,23.858 ; 3Q1.G@107.725,23.095 107.363,23.095 106.6,23.858
Net3Q3_G: 3Q3.G 3Q4.G 3R8.1 | length 45.3
  Bottom Layer w0.6: 3R8.1@114,53.15 114,35.379 121.6,27.779 121.6,23.858 ; 3Q4.G@122.725,13.095 122.363,13.095 121.6,13.858 121.6,23.858 ; 3Q3.G@122.725,23.095 122.363,23.095 121.6,23.858
Net3Q5_G: 3Q5.G 3Q6.G 3R9.1 | length 45.3
  Bottom Layer w0.6: 3R9.1@129,53.15 129,35.379 136.6,27.779 136.6,23.858 ; 3Q6.G@137.725,13.095 137.363,13.095 136.6,13.858 136.6,23.858 ; 3Q5.G@137.725,23.095 137.363,23.095 136.6,23.858
Net3Q7_G: 3Q7.G 3Q8.G 3R12.1 | length 13.5
  Bottom Layer w0.6: 3R12.1@105,53.15 105,51.18 3Q7.G@105.275,50.905 105.637,50.905 106.35,50.192 106.35,41.98 3Q8.G@105.275,40.905
Net3Q9_G: 3Q9.G 3Q10.G 3R13.1 | length 13.5
  Bottom Layer w0.6: 3R13.1@120,53.15 120,51.18 3Q9.G@120.275,50.905 120.637,50.905 121.35,50.192 121.35,41.98 3Q10.G@120.275,40.905
Net3Q11_G: 3Q11.G 3Q12.G 3R14.1 | length 13.5
  Bottom Layer w0.6: 3R14.1@135,53.15 135,51.18 3Q11.G@135.275,50.905 135.637,50.905 136.35,50.192 136.35,41.98 3Q12.G@135.275,40.905
Net3R7_2: 3R7.2 3U1.7 | length 3.8
  Bottom Layer w0.6: 3R7.2@99,54.85 99.852,54.85 101.6,56.598 3U1.7@101.6,57.105
Net3R8_2: 3R8.2 3U2.7 | length 3.8
  Bottom Layer w0.6: 3R8.2@114,54.85 114.852,54.85 116.6,56.598 3U2.7@116.6,57.105
Net3R9_2: 3R9.2 3U3.7 | length 3.8
  Bottom Layer w0.6: 3R9.2@129,54.85 129.852,54.85 131.6,56.598 3U3.7@131.6,57.105
Net3R12_2: 3R12.2 3U1.5 | length 3
  Bottom Layer w0.6: 3U1.5@103.2,57.105 103.2,56.65 3R12.2@105,54.85
Net3R13_2: 3R13.2 3U2.5 | length 3
  Bottom Layer w0.6: 3U2.5@118.2,57.105 118.2,56.65 3R13.2@120,54.85
Net3R14_2: 3R14.2 3U3.5 | length 3
  Bottom Layer w0.6: 3U3.5@133.2,57.105 133.2,56.65 3R14.2@135,54.85
NetC13_1: C13.1 R23.2 U6.6 U7.4
NetC13_2: C13.2 D4.K U6.8
NetC16_2: C16.2 R25.1 U8.5
NetC17_2: C17.2 R28.2 U8.3
NetC18_2: C18.2 R29.2 U8.6
NetC19_2: C19.2 R30.2 U8.7
NetC20_2: C20.2 R31.2 U8.8
NetC21_2: C21.2 R32.2 U8.10
NetC22_2: C22.2 R33.2 U8.11
NetC23_2: C23.2 R34.2 U8.12
NetC24_2: C24.2 R35.2 U8.13
NetC25_2: C25.2 R36.2 U8.14
NetC44_2: C44.2 U9.3
NetD5_K: D5.K L1.2 U9.2
NetJ9_1: J9.1 R18.2
NetJ13_39: J13.39 U8.122
NetJ13_40: J13.40 U8.126
NetLED2_1: LED2.1 R37.1
NetLED2_2: LED2.2 R38.1
NetLED2_3: LED2.3 R39.1
NetQ13_G: Q13.G Q14.G R22.1
NetQ13_S: Q13.S Q14.S Q15.D Q16.D
  other v1: 170.025,25.475 177.025,25.475 171.175,25.5 178.175,25.5 170.025,26.3 177.025,26.3 171.175,26.325 178.175,26.325 170.025,27.15 177.025,27.15 171.175,27.175 178.175,27.175 170.025,27.975 177.025,27.975 171.175,28 178.175,28 169.35,28.6 170.6,28.6 171.85,28.6 176.35,28.6 177.6,28.6 178.85,28.6
NetQ15_G: Q15.G Q16.G R24.1
NetR18_1: R18.1 R19.2 R36.1
NetR20_2: R20.2 U6.2
NetR21_2: R21.2 U6.3
NetR22_2: R22.2 U6.7
NetR24_2: R24.2 U6.5
NetR26_1: R26.1 R27.2 R28.1
NetR35_1: R35.1 U7.6
NetR48_1: R48.1 U9.1 U9.7 U9.8
NetR49_2: R49.2 R50.2 U9.5
NSTATUS: R46.1 U8.136
PWM_AH1: 1R1.2 1U1.2 U8.38
PWM_AH2: 2R1.2 2U1.2 U8.52
PWM_AH3: 3R1.2 3U1.2 U8.92
PWM_AL1: 1R2.2 1U1.3 U8.39
PWM_AL2: 2R2.2 2U1.3 U8.54
PWM_AL3: 3R2.2 3U1.3 U8.93
PWM_BH1: 1R3.2 1U2.2 U8.41
PWM_BH2: 2R3.2 2U2.2 U8.55
PWM_BH3: 3R3.2 3U2.2 U8.99
PWM_BL1: 1R4.2 1U2.3 U8.43
PWM_BL2: 2R4.2 2U2.3 U8.56
PWM_BL3: 3R4.2 3U2.3 U8.100
PWM_CH1: 1R5.2 1U3.2 U8.44
PWM_CH2: 2R5.2 2U3.2 U8.57
PWM_CH3: 3R5.2 3U3.2 U8.101
PWM_CL1: 1R6.2 1U3.3 U8.45
PWM_CL2: 2R6.2 2U3.3 U8.58
PWM_CL3: 3R6.2 3U3.3 U8.102
RESET_N: R43.1 SW1.2 U8.121
STATUSLED_B: R39.2 U8.60
STATUSLED_R: R37.2 U8.59
TCK: J14.1 R47.2 U8.18
TDI: J14.9 R41.1 U8.19
TDO: J14.3 U8.20
TMS: J14.5 R40.1 U8.16
VCC: 1LED1.4 2LED1.4 3LED1.4 C28.2 C29.2 C30.2 C31.2 C32.2 C33.2 C34.2 C35.2 C36.2 C37.2 C38.2 C39.2 C40.2 C41.2 C42.2 C43.2 C54.2 C55.2 C56.2 C57.2 C58.2 C59.2 C60.2 C61.2 C62.2 C63.2 J14.4 J16.1 J16.2 J16.3 J16.4 L2.2 LED2.4 R40.2 R41.2 R42.2 R43.2 R44.2 R45.2 R46.2 R51.2 U8.1 U8.23 U8.31 U8.36 U8.37 U8.40 U8.49 U8.51 U8.67 U8.72 U8.73 U8.82 U8.94 U8.103 U8.108 U8.109 U8.115 U8.117 U8.128 U8.139 U8.144 U10.2 U10.4 U11.3 X1.1 X1.4
pads on no net: 1C1.0 1C2.0 1C3.0 1D1.0 1D2.0 1D3.0 1Q1.7 1Q1.9 1Q1.10 1Q1.11 1Q2.7 1Q2.9 1Q2.10 1Q2.11 1Q3.7 1Q3.9 1Q3.10 1Q3.11 1Q4.7 1Q4.9 1Q4.10 1Q4.11 1Q5.7 1Q5.9 1Q5.10 1Q5.11 1Q6.7 1Q6.9 1Q6.10 1Q6.11 1Q7.7 1Q7.9 1Q7.10 1Q7.11 1Q8.7 1Q8.9 1Q8.10 1Q8.11 1Q9.7 1Q9.9 1Q9.10 1Q9.11 1Q10.7 1Q10.9 1Q10.10 1Q10.11 1Q11.7 1Q11.9 1Q11.10 1Q11.11 1Q12.7 1Q12.9 1Q12.10 1Q12.11 1R1.0 1R2.0 1R3.0 1R4.0 1R5.0 1R6.0 1R7.0 1R8.0 1R9.0 1R10.0 1R11.0 1R12.0 1R13.0 1R14.0 1R15.0 1R16.0 1R17.0 2C1.0 2C2.0 2C3.0 2D1.0 2D2.0 2D3.0 2Q1.7 2Q1.9 2Q1.10 2Q1.11 2Q2.7 2Q2.9 2Q2.10 2Q2.11 2Q3.7 2Q3.9 2Q3.10 2Q3.11 2Q4.7 2Q4.9 2Q4.10 2Q4.11 2Q5.7 2Q5.9 2Q5.10 2Q5.11 2Q6.7 2Q6.9 2Q6.10 2Q6.11 2Q7.7 2Q7.9 2Q7.10 2Q7.11 2Q8.7 2Q8.9 2Q8.10 2Q8.11 2Q9.7 2Q9.9 2Q9.10 2Q9.11 2Q10.7 2Q10.9 2Q10.10 2Q10.11 2Q11.7 2Q11.9 2Q11.10 2Q11.11 2Q12.7 2Q12.9 2Q12.10 2Q12.11 2R1.0 2R2.0 2R3.0 2R4.0 2R5.0 2R6.0 2R7.0 2R8.0 2R9.0 2R10.0 2R11.0 2R12.0 2R13.0 2R14.0 2R15.0 2R16.0 2R17.0 3C1.0 3C2.0 3C3.0 3D1.0 3D2.0 3D3.0 3Q1.7 3Q1.9 3Q1.10 3Q1.11 3Q2.7 3Q2.9 3Q2.10 3Q2.11 3Q3.7 3Q3.9 3Q3.10 3Q3.11 3Q4.7 3Q4.9 3Q4.10 3Q4.11 3Q5.7 3Q5.9 3Q5.10 3Q5.11 3Q6.7 3Q6.9 3Q6.10 3Q6.11 3Q7.7 3Q7.9 3Q7.10 3Q7.11 3Q8.7 3Q8.9 3Q8.10 3Q8.11 3Q9.7 3Q9.9 3Q9.10 3Q9.11 3Q10.7 3Q10.9 3Q10.10 3Q10.11 3Q11.7 3Q11.9 3Q11.10 3Q11.11 3Q12.7 3Q12.9 3Q12.10 3Q12.11 3R1.0 3R2.0 3R3.0 3R4.0 3R5.0 3R6.0 3R7.0 3R8.0 3R9.0 3R10.0 3R11.0 3R12.0 3R13.0 3R14.0 3R15.0 3R16.0 3R17.0 C12.0 C53.0 C54.0 C55.0 C64.0 D4.0 D5.0 FID1.0 FID2.0 FID3.0 FID4.0 J14.0 J14.6 J14.7 L2.0 Q13.7 Q13.9 Q13.10 Q13.11 Q14.7 Q14.9 Q14.10 Q14.11 Q15.7 Q15.9 Q15.10 Q15.11 Q16.7 Q16.9 Q16.10 Q16.11 R18.0 R19.0 R20.0 R21.0 R22.0 R23.0 R24.0 R25.0 R26.0 R27.0 R28.0 R29.0 R30.0 R31.0 R32.0 R33.0 R34.0 R35.0 R36.0 R37.0 R38.0 R39.0 R40.0 R41.0 R42.0 R43.0 R44.0 R45.0 R46.0 R47.0 R48.0 R49.0 R50.0 R51.0 R52.0 U8.21 U8.22 U8.24 U8.25 U10.0 U11.0 U11.1
copper on no net: | length 718.6
  Top Layer w0.254: v2(76,123) v2(91,123)
  Top Layer w0.5: v3(58,169) v3@63.4,169 ; v3(63.5,168.9) 67.9,168.9 v3(68,169) ; v3(73,169) v3@78.4,169 ; v2(74.5,123.9) 95,123.9 ; v2@75,122.248 80,122.248 95,122.248 ; v3(78.5,168.9) v3@82.9,168.9 ; v3(88,169) v3@93.4,169 ; v3(93.5,168.9) v3@97.9,168.9
  Bottom Layer w0.254: 72,125 75.5,128.5 75.5,129.125 ; 72,131 73.875,129.125 74.85,129.125 ; 74,168.5 74,165.573 74.373,165.2 74.373,148.119 76.15,146.342 76.15,129.125 ; v2(76,123) 76.15,123.15 76.15,126.875 ; 87,125 90.5,128.5 90.5,129.125 ; 87,131 88.875,129.125 89.85,129.125 ; 89,168.5 89,165.573 89.373,165.2 89.373,148.119 91.15,146.342 91.15,129.125 ; v2(91,123) 91.15,123.15 91.15,126.875
  Bottom Layer w0.5: 57,173.1 58.4,171.7 59,171.7 59.75,171.7 61.345,170.105 61.8,170.105 ; 57,174.9 58.8,174.9 59,174.7 60.995,174.7 61.8,173.895 ; v3(58,169) 58,169.3 59,170.3 ; 59,173.3 59.3,173 61.5,173 62,172.5 ; 63,172 63.15,172.15 67,172.15 69,172.15 ; 63.4,170.105 63.45,170.055 63.45,168.95 v3(63.5,168.9) ; 64,172.5 64.2,172.7 64.2,173.895 ; v3(68,169) 69,168 69,162 ; 72,173.1 73.4,171.7 74,171.7 74.75,171.7 76.345,170.105 76.8,170.105 ; 72,174.9 73.8,174.9 74,174.7 75.995,174.7 76.8,173.895 ; v3@73,169.3 74,170.3 ; 74,173.3 74.3,173 76.5,173 77,172.5 ; v2(74.5,123.9) 74.848,124.248 74.848,126.875 ; v2(75,122.3) 75,123.336 75.5,123.836 75.5,126.875 ; 78.15,172.15 82,172.15 84,172.15 ; v3@78.45,168.95 78.45,170.055 ; 79.2,172.7 79.2,173.895 ; v3(83,169) 84,168 84,162 ; 87,173.1 88.4,171.7 89,171.7 89.75,171.7 91.345,170.105 91.8,170.105 ; 87,174.9 88.8,174.9 89,174.7 90.995,174.7 91.8,173.895 ; v3@88,169.3 89,170.3 ; 89,173.3 89.3,173 91.5,173 92,172.5 ; v2(89.5,123.9) 89.848,124.248 89.848,126.873 ; v2(90,122.3) 90,123.336 90.5,123.836 90.5,126.875 ; 93.15,172.15 97,172.15 99,172.15 ; v3@93.45,168.95 93.45,170.055 ; 94.2,172.7 94.2,173.895 ; v3(98,169) 99,168 99,162
  Bottom Layer w0.6: 60,166.15 60,148.379 67.6,140.779 67.6,136.858 ; 60,167.85 60.852,167.85 62.6,169.598 62.6,170.105 ; 64.2,170.105 64.2,169.65 66,167.85 ; 66,166.15 66,164.18 66.275,163.905 66.637,163.905 67.35,163.192 67.35,154.98 66.275,153.905 ; 68.725,126.095 68.363,126.095 67.6,126.858 67.6,136.858 ; 68.725,136.095 68.363,136.095 67.6,136.858 ; 75,166.15 75,148.379 82.6,140.779 82.6,136.858 ; 75,167.85 75.852,167.85 77.6,169.598 77.6,170.105 ; 79.2,170.105 79.2,169.65 81,167.85 ; 81,166.15 81,164.18 81.275,163.905 81.637,163.905 82.35,163.192 82.35,154.98 81.275,153.905 ; 83.725,126.095 83.363,126.095 82.6,126.858 82.6,136.858 ; 83.725,136.095 83.363,136.095 82.6,136.858 ; 90,166.15 90,148.379 97.6,140.779 97.6,136.858 ; 90,167.85 90.852,167.85 92.6,169.598 92.6,170.105 ; 94.2,170.105 94.2,169.65 96,167.85 ; 96,166.15 96,164.18 96.275,163.905 96.637,163.905 97.35,163.192 97.35,154.98 96.275,153.905 ; 98.725,126.095 98.363,126.095 97.6,126.858 97.6,136.858 ; 98.725,136.095 98.363,136.095 97.6,136.858
  Bottom Layer w1: 63,147.5 63,167.5 ; 78,147.5 78,167.5 ; 93,147.5 93,167.5
  Bottom Layer w2.54: 63,129.25 63,136.75 63,138 63,139.25 63,142.5 ; 72,118 72,120.8 72,125 ; 72,131 72,150.75 72,152 72,153.25 72,160.75 ; 78,129.25 78,136.75 78,138 78,139.25 78,142.5 ; 87,118 87,120.8 87,125 ; 87,131 87,152 87,153.25 87,160.75 87,162 ; 93,129.25 93,136.75 93,138 93,139.25 93,142.5 ; 102,118 102,150.75 102,152 102,153.25 102,160.75 102,162

## Polygon pours and split planes (outlines as drawn)
GND on Bottom Layer "M0GNDB" (solid, pour order 12): 121,28.5 121,55 114,55 114,35.5
3PH_B_Q on Bottom Layer "M0PHB" (solid, pour order 11): 121,55 128.373,55 128.373,35.229 130,33.501 130,13 121,13
GND on Bottom Layer "M0GNDC" (solid, pour order 12): 136,28 136,55 129,55 129,35
GND on Bottom Layer "M0GNDA" (solid, pour order 12): 106,28.5 106,55 99,55 99,35.5
3PH_A_Q on Bottom Layer "M0PHA" (solid, pour order 11): 106,55 113.373,55 113.373,35.229 115,33.501 115,13 106,13
DCBUS on Bottom Layer "M0DCBUSB" (solid, pour order 22): 115.5,11.5 121.5,11.5 121.5,28.5 115.5,34.5
DCBUS on Bottom Layer "M0DCBUSA" (solid, pour order 22): 100.5,11.5 106.5,11.5 106.5,28.5 100.5,34.5
DCBUS on Bottom Layer "M0DCBUSC" (solid, pour order 22): 130.5,11.5 136.5,11.5 136.5,28.5 130.5,34.5
3PH_A on Bottom Layer "M0PHAO" (solid, pour order 26): 106.5,12.5 110.5,12.5 112,14 115.5,14 115.5,11 121,11 121,0 106.5,0
3PH_B on Bottom Layer "M0PHBO" (solid, pour order 28): 121,12.5 121,0 131,0 131,12.5
3PH_C on Bottom Layer "M0PHCO" (solid, pour order 30): 131,11 131,0 145.5,0 145.5,11
3PH_C on Bottom Layer "M0PHC" (solid, pour order 11): 136,55 144,55 144,35.5 145.5,34 145.5,5 143,2.5 139,2.5 136,5.5
2PH_C on Bottom Layer "M0PHC" (solid, pour order 11): 91,55 99,55 99,35.5 100.5,34 100.5,5 98,2.5 94,2.5 91,5.5
no net on Bottom Layer "M0PHC" (solid, shelved, pour order 11): 97,168 105,168 105,148.5 106.5,147 106.5,118 104,115.5 100,115.5 97,118.5
GND on Bottom Layer "M0GNDB" (solid, pour order 12): 76,28.5 76,55 69,55 69,35.5
2PH_B_Q on Bottom Layer "M0PHB" (solid, pour order 11): 76,55 83.373,55 83.373,35.229 85,33.501 85,13 76,13
GND on Bottom Layer "M0GNDC" (solid, pour order 12): 91,28 91,55 84,55 84,35
GND on Bottom Layer "M0GNDA" (solid, pour order 12): 61,28.5 61,55 54,55 54,35.5
2PH_A_Q on Bottom Layer "M0PHA" (solid, pour order 11): 61,55 68.373,55 68.373,35.229 70,33.501 70,13 61,13
DCBUS on Bottom Layer "M0DCBUSB" (solid, pour order 22): 70.5,11.5 76.5,11.5 76.5,28.5 70.5,34.5
DCBUS on Bottom Layer "M0DCBUSA" (solid, pour order 22): 55.5,11.5 61.5,11.5 61.5,28.5 55.5,34.5
DCBUS on Bottom Layer "M0DCBUSC" (solid, pour order 22): 85.5,11.5 91.5,11.5 91.5,28.5 85.5,34.5
2PH_A on Bottom Layer "M0PHAO" (solid, pour order 26): 61.5,12.5 65.5,12.5 67,14 70.5,14 70.5,11 76,11 76,0 61.5,0
2PH_B on Bottom Layer "M0PHBO" (solid, pour order 28): 76,12.5 76,0 86,0 86,12.5
2PH_C on Bottom Layer "M0PHCO" (solid, pour order 30): 86,11 86,0 100.5,0 100.5,11
GND on Bottom Layer "M0GNDB" (solid, pour order 12): 31,28.5 31,55 24,55 24,35.5
1PH_C on Bottom Layer "M0PHC" (solid, pour order 11): 46,55 54,55 54,35.5 55.5,34 55.5,5 53,2.5 49,2.5 46,5.5
1PH_B_Q on Bottom Layer "M0PHB" (solid, pour order 11): 31,55 38.373,55 38.373,35.229 40,33.501 40,13 31,13
GND on Bottom Layer "M0GNDC" (solid, pour order 12): 46,28 46,55 39,55 39,35
GND on Bottom Layer "M0GNDA" (solid, pour order 12): 16,28.5 16,55 9,55 9,35.5
1PH_A_Q on Bottom Layer "M0PHA" (solid, pour order 11): 16,55 23.373,55 23.373,35.229 25,33.501 25,13 16,13
DCBUS on Bottom Layer "M0DCBUSB" (solid, pour order 22): 25.5,11.5 31.5,11.5 31.5,28.5 25.5,34.5
DCBUS on Bottom Layer "M0DCBUSA" (solid, pour order 22): 10.5,11.5 16.5,11.5 16.5,28.5 10.5,34.5
DCBUS on Bottom Layer "M0DCBUSC" (solid, pour order 22): 40.5,11.5 46.5,11.5 46.5,28.5 40.5,34.5
1PH_A on Bottom Layer "M0PHAO" (solid, pour order 26): 16.5,12.5 20.5,12.5 22,14 25.5,14 25.5,11 31,11 31,0 16.5,0
1PH_B on Bottom Layer "M0PHBO" (solid, pour order 28): 31,12.5 31,0 41,0 41,12.5
1PH_C on Bottom Layer "M0PHCO" (solid, pour order 30): 41,11 41,0 55.5,0 55.5,11
no net on Bottom Layer "M0PHCO" (solid, shelved, pour order 30): 92,124 92,113 106.5,113 106.5,124
no net on Bottom Layer "M0PHBO" (solid, shelved, pour order 28): 82,125.5 82,113 92,113 92,125.5
no net on Bottom Layer "M0PHAO" (solid, shelved, pour order 26): 67.5,125.5 71.5,125.5 73,127 76.5,127 76.5,124 82,124 82,113 67.5,113
DCBUS on Bottom Layer "M0DCBUSC" (solid, shelved, pour order 22): 91.5,124.5 97.5,124.5 97.5,141.5 91.5,147.5
DCBUS on Bottom Layer "M0DCBUSA" (solid, shelved, pour order 22): 61.5,124.5 67.5,124.5 67.5,141.5 61.5,147.5
DCBUS on Bottom Layer "M0DCBUSB" (solid, shelved, pour order 22): 76.5,124.5 82.5,124.5 82.5,141.5 76.5,147.5
no net on Bottom Layer "M0PHA" (solid, shelved, pour order 11): 67,168 74.373,168 74.373,148.229 76,146.501 76,126 67,126
GND on Bottom Layer "M0GNDA" (solid, shelved, pour order 12): 67,141.5 67,168 60,168 60,148.5
GND on Bottom Layer "M0GNDC" (solid, shelved, pour order 12): 97,141 97,168 90,168 90,148
no net on Bottom Layer "M0PHB" (solid, shelved, pour order 11): 82,168 89.373,168 89.373,148.229 91,146.501 91,126 82,126
GND on Bottom Layer "M0GNDB" (solid, shelved, pour order 12): 82,141.5 82,168 75,168 75,148.5
GND on Top Layer "BUSGND" (solid, shelved, pour order 7): 0,32 0,100 150,100 150,32
DCBUS on Top Layer "DCBUS" (solid, shelved, pour order 8): 0,32 0,11.5 150,11.5 150,32

## Text inside footprints (layer, text, board x,y; h text height)
J13: Top Overlay "39" at 168.108,112.892 h1.27 r90; Top Overlay "40" at 165.568,112.892 h1.27 r90; Top Overlay "2" at 165.568,60.06 h1.27 r90; Top Overlay "1" at 168.108,60.06 h1.27 r90
J14: Top Overlay "9" at 157.663,40.053 h0.76 r270; Top Overlay "10" at 165.918,39.005 h0.76 r90; Top Overlay "1" at 157.663,49.771 h0.76 r270; Top Overlay "2" at 165.918,49.426 h0.76 r90